# Altium PCB NFC_Access_R00.PcbDoc (part 2 of 2)
Units mm, origin at the board's own origin, x right, y up, seen from the top; angles counter-clockwise.
Board outline 145 x 60 mm, 2 copper layers (Top Layer, Bottom Layer); 109 components, 94 nets, 438 pads, 146 vias.
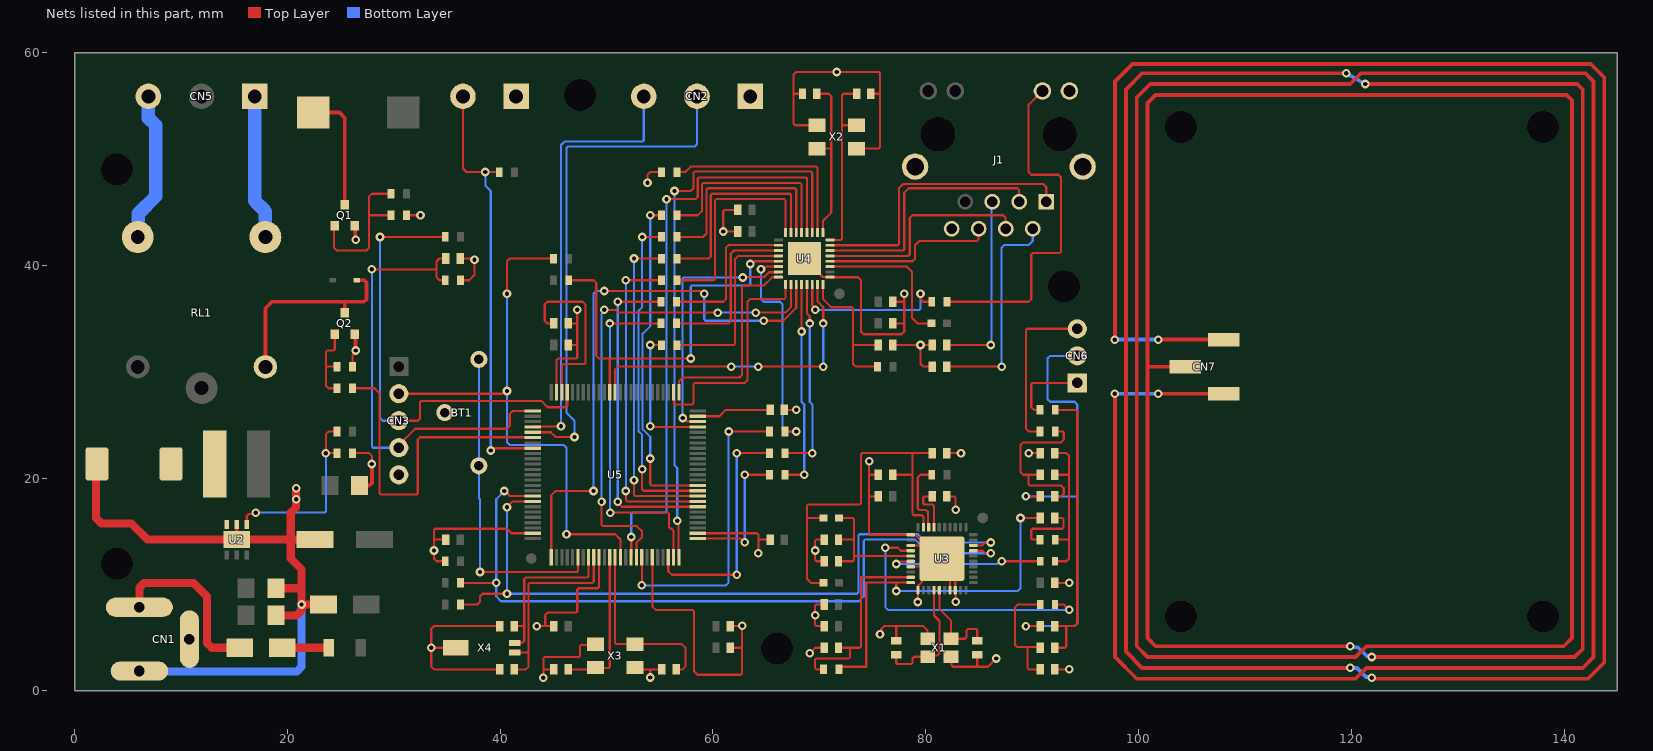
[diagram p2: the nets of this part, all layers, seen from the top]

## Via types
v1: diameter 0.813, hole 0.406, Top Layer to Bottom Layer, tented both sides, 146 vias

## Nets (pads, with @x,y where several pads share a name; then routed paths per layer and width w, separated by ;. In a path a pad name is that pad's centre, name@x,y a point inside that pad or via, vN(x,y) a via of type N, cw(c..) or ccw(c..) an arc to the next point about the centre after c; other vN are vias at no path point) (continued)
GND: BT1.1 C1.2 C2.2 C3.2 C4.2 C5.2 C6.2 C7.1 C8.2 C9.1 C10.2 C11.2 C12.2 C14.2 C15.2 C16.2 C17.2 C18.1 C19.1 C22.2 C23.2 C24.2 C25.2 C26.2 C27.2 C28.2 C29.2 C30.2 C31.2 C32.2 C33.2 C34.2 C35.2 C36.2 C37.2 C38.2 C39.1 C40.2 C41.2 C42.2 C43.2 C44.2 C45.2 CN1.2 CN1.3 CN2.1 CN3.5 CN4.1 CN6.2 D1.1 D2.1 J1.8 J1.12 J1.13 J1.14 Q1.2 Q2.2 R2.1 R14.2 R26.2 R27.1 R30.1 R32.1 U2.2 U2.7 U3.1 U3.3 U3.7 U3.11 U3.17 U3.18 U3.41 U4.1 U4.33 U5.10 U5.20 U5.27 U5.74 U5.99 X1.2 X1.4 X2.2 X2.4 X3.2 X3.4 X4.3 | length 359.3
  Top Layer w0.203: R2.1@26.125,22.352 27.686,22.352 27.94,22.098 v1(27.94,21.336) ; R32.1@26.125,30.48 26.125,31.548 v1@26.416,31.839 ; Q2.2@26.35,33.544 Q2.2@26.416,33.478 ; R30.1@31.205,44.704 v1(32.512,44.704) ; R27.1@34.835,12.192 34.036,12.192 33.782,12.446 v1(33.782,13.208) 33.782,14.224 ; C41.2@34.885,14.224 33.782,14.224 ; X4.3@35.833,4.064 v1(33.528,4.064) ; C33.2@36.235,40.64 37.473,40.64 v1(37.592,40.521) 37.592,39.116 37.084,38.608 R26.2@36.285,38.608 ; C44.2@39.965,2.032 33.782,2.032 33.528,2.286 v1(33.528,4.064) ; C42.2@39.965,6.096 33.782,6.096 33.528,5.842 v1(33.528,4.064) ; U5.99@43.05,14.82 41.06,14.82 40.64,15.24 33.901,15.24 33.782,15.121 33.782,14.224 ; v1(43.434,6.096) 44.24,6.096 ; v1(44.059,1.237) 44.059,2.032 ; C43.2@45.045,2.032 44.059,2.032 ; C34.2@45.045,6.096 44.24,6.096 ; U5.74@45.3,28.07 45.3,31.076 45.466,31.242 47.125,31.242 47.244,31.361 47.244,32.512 ; C36.2@46.395,32.512 47.244,32.512 ; C38.2@46.395,34.544 47.244,34.544 ; v1(47.244,35.814) 47.244,34.544 ; X3.4@48.781,4.318 47.609,4.318 47.49,4.199 47.49,3.302 47.371,3.183 44.178,3.183 44.059,3.064 44.059,2.032 ; U5.10@49.3,12.57 49.3,9.771 49.181,9.652 47.363,9.652 47.244,9.533 47.244,7.485 47.125,7.366 44.45,7.366 44.24,7.156 44.24,6.096 ; X3.2@52.65,2.202 52.82,2.032 54.102,2.032 ; v1(53.848,47.752) 53.848,48.514 54.102,48.768 R14.2@55.155,48.768 ; v1(54.102,1.27) 54.102,2.032 ; U5.20@54.3,12.57 54.3,7.93 54.61,7.62 58.098,7.62 58.217,7.501 58.217,1.846 58.539,1.524 62.619,1.524 62.738,1.643 62.738,4.064 ; C45.2@55.205,2.032 54.102,2.032 ; U5.27@58.55,14.82 64.143,14.82 64.262,14.701 64.262,14.224 ; C39.1@61.635,4.064 62.738,4.064 ; C40.2@61.635,6.096 61.66,6.121 v1(62.738,6.121) ; C27.2@62.317,43.18 v1(60.96,43.18) 60.96,45.093 61.079,45.212 C28.2@62.317,45.212 ; v1@62.738,6.096 62.738,4.064 ; v1(64.262,12.954) 64.262,14.224 ; C35.2@65.365,14.224 64.262,14.224 ; C37.2@66.715,26.416 v1(67.818,26.416) ; C32.2@68.413,56.134 67.564,56.134 ; U4.33@68.58,40.64 70.316,38.904 71.001,38.904 U4.1@71.015,38.89 73.632,38.89 73.914,38.608 73.914,33.782 74.168,33.528 77.724,33.528 77.978,33.782 77.978,34.544 ; v1(69.088,3.556) 69.596,4.064 C17.2@70.445,4.064 ; X2.4@69.778,53.17 67.734,53.17 67.564,53.34 67.564,56.134 ; C10.2@70.445,6.096 69.715,6.096 69.596,6.215 v1(69.596,7.112) 69.596,8.009 69.715,8.128 C9.1@70.445,8.128 ; C8.2@70.445,12.192 69.715,12.192 69.596,12.311 v1(69.596,13.208) 69.596,14.105 69.715,14.224 C7.1@70.445,14.224 ; X2.2@73.478,50.97 75.573,50.97 75.692,51.089 75.692,56.134 ; v1(74.676,21.59) 74.676,20.32 ; C31.2@74.843,56.134 75.692,56.134 ; C11.2@75.525,18.288 74.676,18.288 ; C5.2@75.525,20.32 74.676,20.32 ; v1(75.692,5.334) 75.809,5.451 75.809,5.825 76.079,6.096 77.216,6.096 ; C24.2@76.875,32.512 v1(79.502,32.512) ; C25.2@76.875,34.544 77.978,34.544 ; C26.2@76.875,36.576 77.978,36.576 ; C22.2@77.216,4.739 77.216,6.096 ; v1(77.978,37.338) 77.978,36.576 ; U3.7@78.572,11.684 U3.41@80.772,11.684 ; U3.3@78.572,13.684 U3.41@80.272,13.684 ; v1(79.236,8.37) 79.254,8.388 79.254,9.466 U3.11@79.272,9.484 79.272,9.885 79.621,10.234 79.621,10.533 U3.41@80.772,11.684 ; X1.2@80.18,4.914 80.152,4.942 80.152,5.7 79.756,6.096 77.216,6.096 ; C30.2@80.605,30.48 79.756,30.48 79.502,30.734 v1(79.502,32.512) ; C29.2@80.605,32.512 v1(79.502,32.512) ; C12.2@81.955,18.288 82.685,18.288 82.804,18.169 v1(82.804,17.018) ; C6.2@81.955,22.352 v1(83.312,22.352) ; X1.4@82.114,3.456 X1.4@82.408,3.162 ; U3.17@82.272,9.484 U3.41@82.272,12.434 ; X1.4@82.38,3.214 82.408,3.186 82.408,2.428 82.562,2.274 84.836,2.274 ; v1(82.804,8.382) 82.788,8.398 82.788,9.468 U3.18@82.772,9.484 82.772,12.434 U3.41@82.272,12.434 ; C23.2@84.836,3.389 84.836,2.274 ; v1(86.614,3.048) 85.84,2.274 84.836,2.274 ; v1(89.408,6.096) C15.2@90.765,6.096 ; v1(89.408,18.288) C18.1@90.765,18.288 ; v1(89.662,22.352) C19.1@90.765,22.352 ; C16.2@92.115,2.032 v1(93.472,2.032) ; C14.2@92.115,10.16 v1(93.472,10.16) ; 47.244,32.512 47.244,34.544 ; 67.564,56.134 67.564,57.912 67.818,58.166 v1(71.628,58.166) 75.573,58.166 75.692,58.047 75.692,56.134 ; 74.676,18.288 74.676,14.803 74.795,14.684 U3.1@78.572,14.684 78.62,14.636 79.022,14.636 79.322,14.335 79.621,14.335 U3.41@80.272,13.684 ; 74.676,18.288 74.676,20.32 ; 77.978,34.544 77.978,36.576 ; U3.41@80.272,13.684 U3.41@81.522,12.434 ; U3.41@80.772,11.684 U3.41@81.522,12.434 ; U3.41@81.522,12.434 U3.41@82.272,12.434
  Top Layer w0.356: U2.7@15.24,14.224 U2.2@15.24,15.659 ; Q1.2@26.249,43.603 Q1.2@26.35,43.704 26.383,43.671 26.383,42.451 v1(26.416,42.418) ; v1@26.416,31.839 v1(26.416,32.004) Q2.2@26.416,33.478
  Top Layer w0.381: C4.2@26.8,19.304 27.686,19.304 27.94,19.558 v1(27.94,21.336)
  Top Layer w0.762: D2.1@2.103,21.336 2.032,21.265 2.032,16.256 2.54,15.748 5.334,15.748 6.858,14.224 U2.7@15.24,14.224 20.32,14.224 ; C1.2@18.926,7.112 20.866,7.112 21.326,7.572 21.326,8.118 v1(21.336,8.128) ; C3.2@18.926,9.652 21.326,9.652 ; v1(20.828,19.05) v1(20.828,18.034) 20.828,17.272 20.32,16.764 20.32,14.224 ; C2.2@22.6,14.224 20.32,14.224 ; D1.1@23.4,8.128 v1(21.336,8.128) ; 20.32,14.224 20.32,12.446 21.326,11.44 21.326,9.652 ; 21.326,9.652 21.326,8.138 v1(21.336,8.128)
  Bottom Layer w0.203: v1(89.408,6.096) 93.98,6.096 94.234,6.35 94.234,18.288 ; v1(89.408,18.288) 94.234,18.288 ; CN6.2@94.234,31.496 91.694,31.496 91.441,31.243 91.441,27.429 91.693,27.178 93.98,27.178 94.234,26.924 94.234,18.288
  Bottom Layer w0.762: CN1.2@6.138,1.832 10.796,1.832 ; CN1.3@10.796,4.816 10.796,1.832 ; v1(21.336,8.128) 21.336,2.278 20.89,1.832 10.796,1.832
I2C_SCL: R23.1 U3.27 U5.92 | length 70.8
  Top Layer w0.203: R23.1@36.285,10.16 v1(39.624,10.16) ; v1(40.386,18.796) 40.44,18.796 40.916,18.32 U5.92@43.05,18.32 ; U3.27@84.472,13.184 85.344,13.184 85.586,12.942 v1(86.094,12.942)
  Bottom Layer w0.203: v1(40.386,18.796) 39.624,18.034 39.624,8.89 40.081,8.433 73.711,8.433 74.168,8.89 74.168,14.105 74.287,14.224 78.994,14.224 80.276,12.942 v1(86.094,12.942)
I2C_SDA: R22.1 U3.28 U5.93 | length 68.8
  Top Layer w0.203: R22.1@36.285,8.128 37.846,8.128 38.1,8.382 38.1,8.89 38.354,9.144 v1(40.64,9.144) ; v1(40.64,17.272) 41.188,17.82 U5.93@43.05,17.82 ; U3.28@84.472,13.684 85.312,13.684 85.586,13.958 v1(86.094,13.958)
  Bottom Layer w0.203: v1(40.64,17.272) v1(40.64,9.144) 73.541,9.144 73.66,9.263 73.66,14.613 73.779,14.732 79.248,14.732 80.022,13.958 v1(86.094,13.958)
INTR: R12.2 U4.21 U5.64 | length 38.8
  Top Layer w0.203: R12.2@46.445,38.608 48.768,38.608 49.022,38.354 49.022,31.496 49.276,31.242 50.308,31.242 ; U5.64@50.3,28.07 50.3,31.234 50.308,31.242 ; v1(57.912,31.242) 50.308,31.242 ; v1(63.5,40.132) 63.665,40.132 63.923,40.39 U4.21@66.145,40.39
  Bottom Layer w0.203: v1(57.912,31.242) 57.912,37.981 58.031,38.1 63.381,38.1 63.5,38.219 v1(63.5,40.132)
LEDG_A: R13.1 U4.30 | length 15.5
  Top Layer w0.203: U4.30@69.33,38.205 69.33,36.238 69.596,35.972 v1(69.596,35.814) ; v1(79.502,37.338) 79.548,37.292 79.548,36.784 79.756,36.576 R13.1@80.555,36.576
  Bottom Layer w0.203: v1(69.596,35.814) 79.383,35.814 79.502,35.933 v1(79.502,37.338)
MDC: U4.12 U5.16 | length 57
  Top Layer w0.203: U5.16@52.3,12.57 52.312,12.582 52.312,14.466 v1(52.324,14.478) ; v1(55.626,46.228) 58.353,46.228 58.572,46.447 58.572,48.141 58.691,48.26 68.711,48.26 68.83,48.141 U4.12@68.83,43.075
  Bottom Layer w0.203: v1(52.324,14.478) 52.324,16.645 52.443,16.764 55.507,16.764 55.626,16.883 v1(55.626,46.228)
MDIO: U4.11 U5.25 | length 54.8
  Top Layer w0.203: v1(56.388,46.99) 57.912,46.99 58.166,47.244 58.166,48.694 58.285,48.813 69.211,48.813 69.33,48.694 U4.11@69.33,43.075 ; v1(56.642,16.002) 56.752,15.892 56.752,12.618 U5.25@56.8,12.57
  Bottom Layer w0.203: v1(56.388,46.99) 56.388,21.21 56.642,20.956 v1(56.642,16.002)
NA1: CN5.1 RL1.5 | length 13.6
  Bottom Layer w1.27: CN5.1@16.938,55.88 16.938,46.054 17.938,45.054 RL1.5@17.938,42.66
NC1: CN5.3 RL1.4 | length 14.2
  Top Layer w0.762: RL1.4@5.938,42.66 RL1.4@5.975,42.697
  Bottom Layer w1.27: RL1.4@5.975,42.697 6.006,42.728 6.006,44.868 7.62,46.482 7.62,53.166 6.938,53.848 CN5.3@6.938,55.88
NetBT1_2: BT1.2 U5.6 | length 30.6
  Top Layer w0.203: v1(38.1,11.176) 47.181,11.176 47.3,11.295 U5.6@47.3,12.57
  Bottom Layer w0.203: BT1.2@37.998,31.162 37.998,18.126 38.1,18.024 v1(38.1,11.176)
NetBZ1_2: BZ1.2 Q1.3 | length 11.3
  Top Layer w0.356: BZ1.2@22.445,54.356 24.892,54.356 25.4,53.848 Q1.3@25.4,45.704
NetC12_1: C12.1 U3.37 | length 4.5
  Top Layer w0.203: C12.1@80.605,18.288 79.875,18.288 79.756,18.169 79.756,17.645 79.875,17.526 80.628,17.526 80.772,17.382 U3.37@80.772,15.384
NetC13_1: C13.1 C15.1 R4.2 | length 27.2
  Top Layer w0.203: C13.1@92.115,4.064 93.087,4.064 93.206,4.183 93.206,6.096 ; C15.1@92.115,6.096 93.206,6.096 ; R4.2@92.31,26.416 94.115,26.416 94.234,26.297 94.234,6.35 93.98,6.096 93.206,6.096
NetC13_2: C13.2 C16.1 L4.1 | length 11.7
  Top Layer w0.203: L4.1@90.74,8.128 88.646,8.128 88.392,7.874 88.392,4.318 88.587,4.123 89.566,4.123 ; C13.2@90.753,4.306 90.57,4.123 89.566,4.123 ; C16.1@90.765,2.032 89.685,2.032 89.566,2.151 89.566,4.123
NetC17_1: C17.1 R5.1 U3.9 | length 19.2
  Top Layer w0.203: R5.1@70.395,2.032 69.715,2.032 69.596,2.151 69.596,2.929 69.715,3.048 72.767,3.048 72.886,3.167 72.886,4.064 ; C17.1@71.795,4.064 72.886,4.064 ; U3.9@78.572,10.684 73.902,10.684 73.902,4.183 73.783,4.064 72.886,4.064
NetC18_2: C18.2 C20.1 R6.2 | length 16.1
  Top Layer w0.203: C20.1@90.765,20.32 89.662,20.32 ; C18.2@92.115,18.288 92.71,18.288 92.964,18.542 92.964,19.05 92.71,19.304 89.781,19.304 89.662,19.423 89.662,20.32 ; R6.2@92.165,24.384 92.845,24.384 92.964,24.265 92.964,23.622 92.71,23.368 89.154,23.368 88.9,23.114 88.9,20.574 89.154,20.32 89.662,20.32
NetC21_1: C21.1 R5.2 U3.10 | length 35.4
  Top Layer w0.203: R5.2@72.087,2.274 74.41,2.274 74.41,10.184 77.216,10.184 ; v1(77.216,9.398) 77.216,10.184 ; U3.10@78.572,10.184 77.216,10.184 ; v1(88.9,16.256) C21.1@90.765,16.256
  Bottom Layer w0.203: v1(77.216,9.398) 88.646,9.398 88.9,9.652 v1(88.9,16.256)
NetC21_2: C21.2 R7.1 | length 6.4
  Top Layer w0.203: R7.1@90.715,14.224 90.023,14.224 89.904,14.343 89.904,15.121 90.023,15.24 92.833,15.24 92.952,15.359 92.952,16.137 92.833,16.256 C21.2@92.115,16.256
NetC22_1: C22.1 U3.14 X1.3 | length 11.6
  Top Layer w0.203: C22.1@77.216,3.389 77.216,2.659 77.335,2.54 78.621,2.54 78.74,2.659 78.74,3.048 78.906,3.214 X1.3@80.18,3.214 80.308,3.342 81.066,3.342 81.28,3.556 81.28,6.58 80.772,7.088 U3.14@80.772,9.484
NetC23_1: C23.1 U3.15 X1.1 | length 9.3
  Top Layer w0.203: U3.15@81.272,9.484 81.272,7.723 82.38,6.615 X1.1@82.38,4.914 83.654,4.914 83.82,5.08 83.82,5.711 83.939,5.83 84.717,5.83 84.836,5.711 C23.1@84.836,4.739
NetC29_1: C29.1 J1.5 | length 17.7
  Top Layer w0.203: C29.1@81.955,32.512 85.852,32.512 85.895,32.555 86.063,32.555 v1(86.106,32.512)
  Bottom Layer w0.203: v1(86.106,32.512) 86.17,32.576 86.17,45.912 J1.5@86.234,45.976
NetC30_1: C30.1 J1.2 | length 20.7
  Top Layer w0.203: C30.1@81.955,30.48 v1(87.122,30.48)
  Bottom Layer w0.203: v1(87.122,30.48) 87.122,41.656 87.376,41.91 89.662,41.91 90.044,42.292 J1.2@90.044,43.436
NetC31_1: C31.1 U4.8 X2.3 | length 17.4
  Top Layer w0.203: U4.8@71.015,42.39 72.017,42.39 72.136,42.509 72.136,53.17 ; X2.3@73.478,53.17 72.136,53.17 ; C31.1@73.493,56.134 72.255,56.134 72.136,56.015 72.136,53.17
NetC32_1: C32.1 U4.9 X2.1 | length 17.2
  Top Layer w0.203: C32.1@69.763,56.134 70.866,56.134 71.12,55.88 71.12,50.975 X2.1@69.783,50.975 ; X2.1@69.778,50.97 71.046,50.97 71.12,50.896 71.12,44.958 70.33,44.168 U4.9@70.33,43.075
NetC37_1: C37.1 U5.49 | length 7.1
  Top Layer w0.203: U5.49@58.55,25.82 60.618,25.82 61.214,26.416 C37.1@65.365,26.416
NetC38_1: C38.1 U5.73 | length 16.8
  Top Layer w0.203: C38.1@45.045,34.544 44.45,34.544 44.196,34.798 44.196,36.338 44.434,36.576 47.752,36.576 48.006,36.322 48.006,30.853 47.887,30.734 45.974,30.734 45.8,30.56 U5.73@45.8,28.07
NetC42_1: C42.1 U5.8 X4.2 | length 15.7
  Top Layer w0.203: C42.1@41.315,6.096 42.266,6.096 ; X4.2@41.383,4.514 41.441,4.572 42.147,4.572 42.266,4.691 42.266,6.096 ; U5.8@48.3,12.57 48.3,10.787 48.181,10.668 42.418,10.668 42.266,10.516 42.266,6.096
NetC43_1: C43.1 U5.12 X3.1 | length 14.3
  Top Layer w0.203: C43.1@46.395,2.032 48.78,2.032 X3.1@48.95,2.202 ; X3.1@48.95,2.153 50.181,2.153 50.3,2.272 U5.12@50.3,12.57
NetC44_1: C44.1 U5.9 X4.1 | length 19
  Top Layer w0.203: C44.1@41.315,2.032 42.418,2.032 42.672,2.286 42.672,3.556 ; X4.1@41.383,3.614 42.614,3.614 42.672,3.556 ; U5.9@48.8,12.57 48.8,10.279 48.681,10.16 42.791,10.16 42.672,10.041 42.672,3.556
NetC45_1: C45.1 U5.13 X3.3 | length 17.6
  Top Layer w0.203: U5.13@50.8,12.57 50.8,4.521 50.919,4.402 57.066,4.402 57.404,4.064 57.404,2.286 57.15,2.032 C45.1@56.555,2.032
NetCN1_1: CN1.1 D4.1 | length 16.3
  Top Layer w0.762: CN1.1@6.096,8.128 6.096,9.714 6.542,10.16 11.176,10.16 12.446,8.89 12.446,4.51 12.892,4.064 D4.1@15.526,4.064
NetCN4_2: CN4.2 R28.1 U5.83 | length 40.7
  Top Layer w0.203: CN4.2@36.5,55.88 36.5,49.098 36.83,48.768 v1(38.608,48.768) R28.1@39.915,48.768 ; v1(39.116,22.606) 39.281,22.606 39.495,22.82 U5.83@43.05,22.82
  Bottom Layer w0.203: v1(38.608,48.768) 38.608,47.498 39.116,46.99 v1(39.116,22.606)
NetCN6_1: CN6.1 R4.1 | length 7.6
  Top Layer w0.203: R4.1@90.85,26.416 R4.1@90.715,26.416 90.17,26.416 89.916,26.67 89.916,28.837 90.035,28.956 CN6.1@94.234,28.956
NetCN6_3: CN6.3 R6.1 | length 15.6
  Top Layer w0.203: R6.1@90.715,24.384 89.662,24.384 89.408,24.638 89.408,33.917 89.527,34.036 CN6.3@94.234,34.036
NetCN7_1: CN7.1 CN7.2 CN7.3 | length 792.4
  Top Layer w0.356: v1@97.79,27.94 97.79,3.19 99.822,1.158 120.396,1.158 121.412,2.174 141.732,2.174 142.748,3.19 142.748,57.292 141.986,58.054 120.904,58.054 119.888,57.038 101.092,57.038 99.822,55.768 99.822,4.206 100.838,3.19 120.396,3.19 121.412,4.206 139.954,4.206 140.716,4.968 140.716,55.514 140.208,56.022 101.6,56.022 100.838,55.26 100.838,30.48 ; v1@97.79,33.02 97.79,57.292 99.426,58.928 142.494,58.928 143.764,57.658 143.764,2.682 142.24,1.158 121.999,1.158 v1(121.92,1.237) ; v1(101.854,27.94) CN7.3@107.696,27.94 ; v1(101.854,33.02) CN7.1@107.95,33.02 ; CN7.2@104.14,30.48 100.838,30.48 ; v1(119.507,58.054) 100.33,58.054 98.806,56.53 98.806,3.698 100.33,2.174 v1(119.888,2.174) ; v1(119.888,4.206) 101.6,4.206 100.838,4.968 100.838,30.48 ; v1(121.285,57.038) 141.224,57.038 141.732,56.53 141.732,3.952 140.97,3.19 v1(121.92,3.19)
  Bottom Layer w0.356: v1(97.764,27.94) v1(101.854,27.94) ; v1(97.764,33.02) v1(101.854,33.02) ; v1(119.507,58.054) v1(121.285,57.038) ; v1(119.888,2.174) 120.508,2.174 121.374,1.308 121.848,1.308 v1(121.92,1.237) ; v1(119.888,4.206) 119.975,4.119 120.595,4.119 121.437,3.277 121.833,3.277 v1(121.92,3.19)
NetD3_1: D3.1 Q2.3 RL1.2 | length 19
  Top Layer w0.356: RL1.2@17.938,30.46 17.938,35.972 18.542,36.576 25.4,36.576 ; Q2.3@25.4,35.544 25.4,36.576 ; D3.1@26.525,38.608 27.224,38.608 27.432,38.4 27.432,36.784 27.224,36.576 25.4,36.576
NetD4_2: D4.2 P1.1 | length 4.4
  Top Layer w0.762: D4.2@19.526,4.064 P1.1@23.9,4.064
NetJ1_1: J1.1 U4.7 | length 27.3
  Top Layer w0.203: U4.7@71.015,41.89 77.351,41.89 77.47,42.009 77.47,47.244 77.876,47.65 91.034,47.65 91.314,47.37 J1.1@91.314,45.976
NetJ1_3: J1.3 U4.6 | length 24.5
  Top Layer w0.203: U4.6@71.015,41.39 77.859,41.39 77.978,41.509 77.978,46.838 78.384,47.244 88.587,47.244 88.774,47.057 J1.3@88.774,45.976
NetJ1_4: J1.4 U4.5 | length 21.2
  Top Layer w0.203: U4.5@71.015,40.89 71.019,40.894 78.367,40.894 78.486,41.013 78.486,44.45 78.74,44.704 87.25,44.704 87.504,44.45 J1.4@87.504,43.436
NetJ1_6: J1.6 U4.4 | length 16.5
  Top Layer w0.203: U4.4@71.015,40.39 78.744,40.39 78.994,40.64 78.994,41.91 79.375,42.291 84.777,42.291 84.964,42.478 J1.6@84.964,43.436
NetJ1_11: J1.11 R13.2 | length 33.5
  Top Layer w0.203: R13.2@82.005,36.576 89.662,36.576 89.916,36.83 89.916,41.029 90.035,41.148 92.591,41.148 92.71,41.267 92.71,48.26 92.456,48.514 89.916,48.514 89.662,48.768 89.662,55.089 J1.11@90.959,56.386
NetQ1_1: Q1.1 R29.1 R30.2 | length 14.7
  Top Layer w0.203: Q1.1@24.45,43.704 24.384,43.638 24.384,41.656 24.638,41.402 27.432,41.402 27.686,41.656 27.686,44.704 ; R30.2@29.755,44.704 27.686,44.704 ; R29.1@29.755,46.736 27.94,46.736 27.686,46.482 27.686,44.704
NetQ2_1: Q2.1 R31.1 R32.2 | length 7.7
  Top Layer w0.203: Q2.1@24.45,33.544 24.45,32.123 24.331,32.004 23.741,32.004 23.622,31.885 23.622,30.48 ; R31.1@24.675,28.448 23.876,28.448 23.622,28.702 23.622,30.48 ; R32.2@24.675,30.48 23.622,30.48
NetR3_2: R3.2 U3.38 | length 6.9
  Top Layer w0.203: U3.38@80.272,15.384 80.224,15.432 80.224,15.779 80.201,15.801 80.201,16.827 80.01,17.018 79.367,17.018 79.248,17.137 79.248,20.066 79.502,20.32 R3.2@80.555,20.32
NetR8_1: R8.1 U4.29 | length 18.6
  Top Layer w0.203: R8.1@66.765,22.352 v1(69.342,22.352) ; U4.29@68.83,38.205 68.83,35.475 69.088,35.217 v1(69.088,34.544)
  Bottom Layer w0.203: v1(69.088,34.544) 69.088,27.178 69.342,26.924 v1(69.342,22.352)
NetR8_2: R8.2 U5.23 | length 22.4
  Top Layer w0.203: U5.23@55.8,12.57 55.8,11.256 56.134,10.922 v1(62.23,10.922) ; v1(62.23,22.352) R8.2@65.315,22.352
  Bottom Layer w0.203: v1(62.23,10.922) v1(62.23,22.352)
NetR9_2: R9.2 U5.18 | length 29
  Top Layer w0.203: U5.18@53.3,12.57 53.32,12.55 v1(53.32,9.926) ; v1(61.468,24.384) R9.2@65.315,24.384
  Bottom Layer w0.203: v1(53.32,9.926) 53.34,9.906 61.214,9.906 61.468,10.16 v1(61.468,24.384)
NetR10_1: R10.1 U4.28 | length 19.8
  Top Layer w0.203: R10.1@66.765,20.32 v1(68.58,20.32) ; v1(68.326,33.782) 68.328,33.784 68.328,38.203 U4.28@68.33,38.205
  Bottom Layer w0.203: v1(68.326,33.782) 68.326,27.178 68.58,26.924 v1(68.58,20.32)
NetR10_2: R10.2 U5.26 | length 13.3
  Top Layer w0.203: U5.26@58.55,14.32 62.642,14.32 v1(62.992,13.97) ; v1(62.992,20.32) R10.2@65.315,20.32
  Bottom Layer w0.203: v1(62.992,13.97) v1(62.992,20.32)
NetR14_1: R14.1 U4.10 | length 19.6
  Top Layer w0.203: R14.1@56.605,48.768 57.404,48.768 57.912,49.276 69.711,49.276 69.83,49.157 U4.10@69.83,43.075
NetR15_1: R15.1 U4.16 | length 20.8
  Top Layer w0.203: R15.1@56.605,38.608 60.079,38.608 60.198,38.727 60.198,46.109 60.317,46.228 66.711,46.228 66.83,46.109 U4.16@66.83,43.075
NetR15_2: R15.2 U5.33 | length 30.8
  Top Layer w0.203: v1(51.816,18.796) 51.816,17.939 51.935,17.82 U5.33@58.55,17.82 ; v1(51.816,38.608) R15.2@55.155,38.608
  Bottom Layer w0.203: v1(51.816,18.796) v1(51.816,38.608)
NetR16_2: R16.2 U5.47 | length 13.2
  Top Layer w0.203: v1(54.102,24.892) 54.174,24.82 U5.47@58.55,24.82 ; v1(54.102,32.512) R16.2@55.155,32.512
  Bottom Layer w0.203: v1(54.102,24.892) v1(54.102,32.512)
NetR17_1: R17.1 U4.15 | length 20.2
  Top Layer w0.203: R17.1@56.605,40.64 59.571,40.64 59.792,40.861 59.792,46.617 59.911,46.736 67.211,46.736 67.33,46.617 U4.15@67.33,43.075
NetR17_2: R17.2 U5.34 | length 30.8
  Top Layer w0.203: v1(52.578,19.812) 52.578,18.439 52.697,18.32 U5.34@58.55,18.32 ; v1(52.578,40.64) R17.2@55.155,40.64
  Bottom Layer w0.203: v1(52.578,19.812) v1(52.578,40.64)
NetR18_2: R18.2 U5.24 | length 32.5
  Top Layer w0.203: v1(50.292,34.544) R18.2@55.118,34.544 ; v1(50.343,16.764) 55.761,16.764 55.88,16.645 55.88,15.359 55.999,15.24 56.134,15.24 56.3,15.074 U5.24@56.3,12.57
  Bottom Layer w0.203: v1(50.292,34.544) 50.317,34.519 50.317,16.789 v1(50.343,16.764)
NetR19_1: R19.1 U4.14 | length 19.6
  Top Layer w0.203: R19.1@56.605,42.672 59.063,42.672 59.385,42.994 59.385,47.125 59.504,47.244 67.699,47.244 67.818,47.125 67.818,43.087 U4.14@67.83,43.075
NetR19_2: R19.2 U5.35 | length 31.1
  Top Layer w0.203: v1(53.34,20.828) 53.34,18.939 53.459,18.82 U5.35@58.55,18.82 ; v1(53.34,42.672) R19.2@55.155,42.672
  Bottom Layer w0.203: v1(53.34,20.828) 53.34,24.073 52.984,24.429 52.984,35.712 53.34,36.068 v1(53.34,42.672)
NetR20_2: R20.2 U5.32 | length 30.6
  Top Layer w0.203: v1(51.054,17.78) 51.054,17.697 51.431,17.32 U5.32@58.55,17.32 ; v1(51.054,36.576) R20.2@55.118,36.576
  Bottom Layer w0.203: v1(51.054,17.78) v1(51.054,36.576)
NetR21_1: R21.1 U4.13 | length 19.1
  Top Layer w0.203: R21.1@56.605,44.704 58.555,44.704 58.979,45.128 58.979,47.633 59.098,47.752 68.211,47.752 68.33,47.633 U4.13@68.33,43.075
NetR21_2: R21.2 U5.36 | length 31.4
  Top Layer w0.203: v1(54.102,21.844) 54.102,19.431 54.221,19.312 58.542,19.312 U5.36@58.55,19.32 ; v1(54.102,44.704) R21.2@55.155,44.704
  Bottom Layer w0.203: v1(54.102,21.844) 54.102,23.886 53.391,24.597 53.391,33.579 54.102,34.29 v1(54.102,44.704)
NetU4_24: U4.24 U5.51 | length 19.3
  Top Layer w0.203: U5.51@56.8,28.07 56.8,29.114 57.15,29.464 62.484,29.464 62.738,29.718 62.738,37.981 62.857,38.1 64.77,38.1 65.56,38.89 U4.24@66.145,38.89
NetU4_25: U4.25 U5.52 | length 22.4
  Top Layer w0.203: U5.52@56.3,28.07 56.348,28.022 56.348,27.043 56.467,26.924 58.047,26.924 58.166,27.043 58.166,28.837 58.285,28.956 62.992,28.956 63.246,29.21 63.246,36.576 63.5,36.83 66.711,36.83 66.83,36.949 U4.25@66.83,38.205
NetU4_26: U4.26 U5.17 | length 47
  Top Layer w0.203: v1(49.53,17.78) 49.53,15.613 49.649,15.494 52.832,15.494 53.34,14.986 53.34,14.478 52.8,13.938 U5.17@52.8,12.57 ; v1(49.784,35.814) 50.8,35.814 51.054,35.56 v1(60.452,35.56) ; v1(64.008,35.56) 66.802,35.56 67.32,36.078 67.32,38.195 U4.26@67.33,38.205
  Bottom Layer w0.203: v1(49.53,17.78) 49.53,35.395 49.784,35.649 v1(49.784,35.814) ; v1(60.452,35.56) v1(64.008,35.56)
NetU4_27: U4.27 U5.1 | length 52.9
  Top Layer w0.203: U5.1@44.8,12.57 44.8,18.384 45.212,18.796 v1(48.768,18.796) ; v1(49.784,37.592) 58.763,37.592 59.017,37.338 v1(59.182,37.338) ; v1(64.77,34.798) 66.615,34.798 67.83,36.013 U4.27@67.83,38.205
  Bottom Layer w0.203: v1(48.768,18.796) 48.768,37.338 49.022,37.592 v1(49.784,37.592) ; v1(59.182,37.338) 59.182,34.917 59.301,34.798 v1(64.77,34.798)
NRST: CN3.2 R25.2 U5.14 | length 52.6
  Top Layer w0.203: CN3.2@30.48,27.94 40.221,27.94 40.475,28.194 v1(40.64,28.194) ; v1(40.64,37.338) 40.64,40.386 40.894,40.64 R25.2@44.995,40.64 ; v1(46.228,14.732) 50.8,14.732 51.3,14.232 U5.14@51.3,12.57
  Bottom Layer w0.203: v1(40.64,37.338) v1(40.64,28.194) 40.64,23.368 40.894,23.114 45.974,23.114 46.228,22.86 v1(46.228,14.732)
RELE: R31.2 U5.81 | length 31.8
  Top Layer w0.203: R31.2@26.125,28.448 28.194,28.448 28.651,27.991 28.651,18.585 28.77,18.466 32.139,18.466 32.258,18.585 32.258,23.622 32.484,23.848 43.022,23.848 U5.81@43.05,23.82
RESET: C24.1 R11.2 U4.32 | length 14.6
  Top Layer w0.203: U4.32@70.33,38.205 70.33,36.858 71.12,36.068 73.033,36.068 73.152,35.949 73.152,32.512 ; R11.2@75.475,30.48 73.406,30.48 73.152,30.734 73.152,32.512 ; C24.1@75.525,32.512 73.152,32.512
RX: C19.2 C20.2 L5.1 R7.2 | length 15.2
  Top Layer w0.203: C20.2@92.115,20.32 93.472,20.32 ; C19.2@92.115,22.352 93.218,22.352 93.472,22.098 93.472,20.32 ; L5.1@92.14,12.192 93.218,12.192 93.472,12.446 93.472,14.224 ; R7.2@92.165,14.224 93.472,14.224 ; 93.472,14.224 93.472,20.32
RXC: R18.1 U4.19 | length 16.1
  Top Layer w0.203: R18.1@56.568,34.544 61.468,34.544 61.671,34.747 61.671,41.097 61.976,41.402 66.133,41.402 U4.19@66.145,41.39
RXDV: R20.1 U4.18 | length 14.6
  Top Layer w0.203: R20.1@56.568,36.576 60.96,36.576 61.214,36.83 61.214,41.656 61.468,41.91 66.125,41.91 U4.18@66.145,41.89
RXER: R16.1 U4.20 | length 17.7
  Top Layer w0.203: R16.1@56.605,32.512 61.959,32.512 62.078,32.631 62.078,40.589 62.382,40.894 66.141,40.894 U4.20@66.145,40.89
SW: D2.2 L1.1 U2.3
SWCLK: C33.1 CN3.4 R26.1 U5.76 | length 43.5
  Top Layer w0.203: v1(27.94,39.624) 34.019,39.624 ; CN3.4@30.48,22.86 30.48,23.114 32.004,24.638 40.64,24.638 40.894,24.892 40.894,26.043 41.171,26.32 U5.76@43.05,26.32 ; R26.1@34.835,38.608 34.29,38.608 34.019,38.879 34.019,39.624 ; C33.1@34.885,40.64 34.29,40.64 34.019,40.369 34.019,39.624
  Bottom Layer w0.203: v1(27.94,39.624) 27.94,22.979 28.059,22.86 CN3.4@30.48,22.86
SWIO: CN3.3 R24.2 U5.72 | length 44.1
  Top Layer w0.203: v1(28.702,42.672) R24.2@34.835,42.672 ; CN3.3@30.48,25.4 32.258,25.4 32.471,25.613 32.471,27.137 32.601,27.267 43.853,27.267 44.45,26.67 46.181,26.67 46.3,26.789 U5.72@46.3,28.07
  Bottom Layer w0.203: v1(28.702,42.672) 28.702,25.654 28.956,25.4 CN3.3@30.48,25.4
TVDD: C7.2 C8.1 L2.2 U3.5 | length 13.6
  Top Layer w0.203: C8.1@71.795,12.192 73.146,12.192 73.265,12.311 73.265,12.688 ; C7.2@71.795,14.224 73.265,14.224 ; L2.2@71.845,16.256 73.146,16.256 73.265,16.137 73.265,14.224 ; U3.5@78.568,12.688 73.265,12.688 ; 73.265,12.688 73.265,14.224
TX1: L4.2 U3.4 | length 27
  Top Layer w0.203: v1(76.2,13.462) 77.357,13.462 77.635,13.184 U3.4@78.572,13.184 ; L4.2@92.14,8.128 92.964,8.128 v1(93.472,7.62)
  Bottom Layer w0.203: v1(76.2,13.462) 76.2,7.874 76.454,7.62 v1(93.472,7.62)
TX2: L5.2 U3.6 | length 15.1
  Top Layer w0.203: v1(77.216,11.938) 77.381,11.938 77.627,12.184 U3.6@78.572,12.184 ; v1(87.122,12.192) L5.2@90.74,12.192
  Bottom Layer w0.203: v1(77.216,11.938) 86.703,11.938 86.957,12.192 v1(87.122,12.192)
TXC: R9.1 U4.22 | length 20.9
  Top Layer w0.203: v1(64.516,39.624) 64.674,39.624 64.94,39.89 U4.22@66.145,39.89 ; R9.1@66.765,24.384 v1(67.818,24.384)
  Bottom Layer w0.203: v1(64.516,39.624) 64.516,36.83 64.77,36.576 66.294,36.576 66.548,36.322 66.548,24.638 66.802,24.384 v1(67.818,24.384)
TXEN: U4.23 U5.48 | length 23.9
  Top Layer w0.203: v1(57.15,25.654) 57.217,25.654 57.551,25.32 U5.48@58.55,25.32 ; v1(62.789,38.862) 62.84,38.913 64.821,38.913 65.265,39.357 66.112,39.357 U4.23@66.145,39.39
  Bottom Layer w0.203: v1(57.15,25.654) 57.15,38.743 57.269,38.862 v1(62.789,38.862)
TXER: U4.31 U5.63 | length 29.8
  Top Layer w0.203: U5.63@50.8,28.07 50.8,30.226 51.054,30.48 v1(61.722,30.48) ; v1(64.262,30.48) v1(70.358,30.48) ; U4.31@69.83,38.205 69.83,36.596 70.358,36.068 v1(70.358,34.544)
  Bottom Layer w0.203: v1(61.722,30.48) v1(64.262,30.48) ; v1(70.358,30.48) v1(70.358,34.544)
VDDA_3.3: L6.2 U4.3 | length 14.3
  Top Layer w0.203: U4.3@71.015,39.89 71.027,39.878 78.232,39.878 78.689,39.421 78.689,35.103 79.248,34.544 L6.2@80.555,34.544
VFB: R1.1 R2.2 U2.1 | length 17.9
  Top Layer w0.203: U2.1@16.19,15.659 16.19,16.444 16.393,16.647 16.901,16.647 v1(17.018,16.764) ; R2.2@24.675,22.352 v1(23.622,22.352) 23.622,24.13 23.876,24.384 R1.1@24.675,24.384
  Bottom Layer w0.203: v1(17.018,16.764) 23.503,16.764 23.622,16.883 v1(23.622,22.352)
VLDO: C5.1 C6.1 L2.1 L3.1 U3.39 | length 36.4
  Top Layer w0.203: L3.1@70.395,10.16 69.207,10.16 68.834,10.533 68.834,16.256 ; L2.1@70.395,16.256 68.834,16.256 ; C5.1@76.875,20.32 78.74,20.32 ; U3.39@79.772,15.384 79.772,16.391 79.653,16.51 78.859,16.51 78.74,16.629 78.74,20.32 ; C6.1@80.605,22.352 78.74,22.352 ; 68.834,16.256 68.834,17.407 68.953,17.526 73.795,17.526 73.914,17.645 73.914,22.233 74.033,22.352 78.74,22.352 ; 78.74,20.32 78.74,22.352
WEIGAND_D1: CN2.2 U5.80 | length 48.5
  Top Layer w0.203: U5.80@43.05,24.32 44.768,24.32 45.212,23.876 v1(46.99,23.876)
  Bottom Layer w0.203: v1(46.99,23.876) 46.99,25.4 46.228,26.162 46.228,51.037 46.347,51.156 58.268,51.156 58.5,51.388 CN2.2@58.5,55.88
WIEGAND_D0: CN2.3 U5.79 | length 41.2
  Top Layer w0.203: U5.79@43.05,24.82 43.086,24.856 45.684,24.856 v1(45.72,24.892)
  Bottom Layer w0.203: v1(45.72,24.892) 45.72,51.308 46.054,51.642 53.381,51.642 53.5,51.761 CN2.3@53.5,55.88
pads on no net: J1. J1.7 J1.9 J1.10 U2.6 U3.2 U3.12 U3.13 U3.19 U3.20 U3.21 U3.22 U3.24 U3.25 U3.26 U3.29 U3.30 U3.31 U3.32 U3.33 U3.34 U3.35 U3.36 U5.2 U5.3 U5.4 U5.5 U5.7 U5.15 U5.29 U5.30 U5.31 U5.37 U5.38 U5.39 U5.40 U5.41 U5.42 U5.43 U5.44 U5.45 U5.46 U5.53 U5.54 U5.55 U5.56 U5.57 U5.58 U5.59 U5.60 U5.61 U5.62 U5.65 U5.66 U5.67 U5.68 U5.69 U5.70 U5.71 U5.77 U5.78 U5.84 U5.85 U5.86 U5.87 U5.88 U5.89 U5.90 U5.91 U5.95 U5.96 U5.97 U5.98

## Polygon pours and split planes (outlines as drawn)
SW on Top Layer "SW_L01_P000" (solid, pour order 0): 7.366,15.24 15.24,15.24 15.24,25.654 7.366,25.654
GND on Bottom Layer "GND_L02_P001" (solid, remove dead copper, pour order 1): 20.32,59.436 96.52,59.436 96.52,0.508 30.48,0.508 30.48,16.256 20.32,16.256

## Keep-outs
Keep-Out Layer:
  circle w0.254: c93,38 r2.171
  circle w0.254: c47.5,56 r2.112
  circle w0.254: c4,49 r2.103
  circle w0.254: c66,4 r2.15
  circle w0.254: c4,12 r2.244
  lines w0.254: 0.508,0.5 144.448,0.5 144.448,59.5 0.508,59.5 0.508,0.508

## Silkscreen, mask and mechanical layers (free items; w line width, h text height)
Top Overlay:
  circle w0.127: c138,7 r2
  circle w0.127: c104,7 r2
  circle w0.127: c138,53 r2
  circle w0.127: c104,53 r2
  circle w0.127: c66,4 r2
  circle w0.127: c93,38 r2
  circle w0.127: c47.5,56 r2
  circle w0.127: c4,49 r2
  circle w0.127: c4,12 r2
Mechanical 1:
  the board outline again, w0.254
Mechanical 6:
  lines w0.254: 0,2.032 97,2.032 ; 0,4.064 97,4.064 ; 0,6.096 97,6.096 ; 0,8.128 97,8.128 ; 0,10.16 97,10.16 ; 0,12.192 97,12.192 ; 0,14.224 97,14.224 ; 0,16.256 97,16.256 ; 0,18.288 97,18.288 ; 0,20.32 97,20.32 ; 0,22.352 97,22.352 ; 0,24.384 97,24.384 ; 0,26.416 97,26.416 ; 0,28.448 97,28.448 ; 0,30.48 97,30.48 ; 0,32.512 97,32.512 ; 0,34.544 97,34.544 ; 0,36.576 97,36.576 ; 0,38.608 97,38.608 ; 0,40.64 97,40.64 ; 0,42.672 97,42.672 ; 0,44.704 97,44.704 ; 0,46.736 97,46.736 ; 0,48.768 97,48.768 ; 0,50.8 97,50.8 ; 0,52.832 97,52.832 ; 0,54.864 97,54.864 ; 0,56.896 97,56.896 ; 0,58.928 97,58.928 ; 5.08,0 5.08,60 ; 10.16,0 10.16,60 ; 15.24,0 15.24,60 ; 20.32,0 20.32,60 ; 25.4,0 25.4,60 ; 30.48,0 30.48,60 ; 35.56,0 35.56,60 ; 40.64,0 40.64,60 ; 45.72,0 45.72,60 ; 50.8,0 50.8,60 ; 55.88,0.762 55.88,60 ; 60.96,0 60.96,60 ; 66.04,-0.254 66.04,60 ; 71.12,0 71.12,60 ; 76.2,0 76.2,60 ; 81.28,0 81.28,60 ; 86.36,0 86.36,60 ; 91.44,0 91.44,60 ; 96.52,0 96.52,60
Mechanical 7:
Mechanical 15:
  lines w0.254: 97,0 97,60